# EAGLE board fabkit02 (EAGLE 5.11)
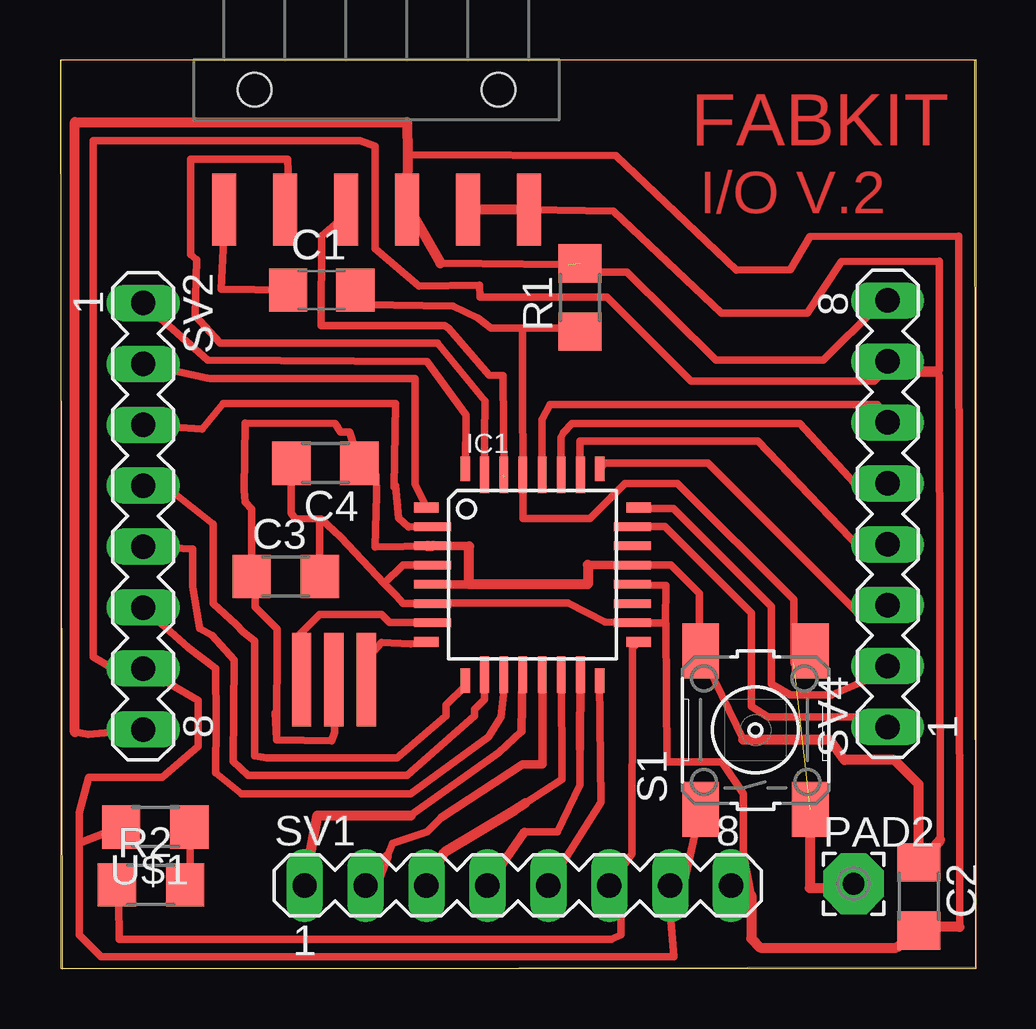
[diagram p0: board, top side]

Size 38.18 x 37.89 mm. Coordinates in mm from the lower left corner, seen from the top.
Outline: 0.1,0 38.18,0.08 38.13,37.89 0,37.89 0.1,0
Copper layers (1*16): Top 0.035mm / dielectric 1.5mm / Bottom 0.035mm
Design rules "default *": minimum track width 10mil, minimum drill 24mil, track to track 16mil, track to pad 16mil, pad to pad 16mil, via to via 16mil, smd to smd 16mil, copper to edge 16mil, drill to drill 8mil, minimum pad ring 10mil, minimum via ring 8mil, stop-mask expansion 4mil, vias tented up to drill 0mil, thermal gap 10mil
Milling: area 0,0 to 38.2,37.9

## Footprints (pad centres in the part's own frame; a part is rotated, then mirrored left to right if it is on the bottom)
C1206 = smd 1.6 x 1.8: 1 -1.4,0; 2 1.4,0
1206 = smd 1.6 x 1.803: 1 -1.422,0; 2 1.422,0
TQFP32-08 = smd 1.016 x 0.406: 1 -4.42,2.8; 8 -4.42,-2.8; 17 4.42,-2.8; 24 4.42,2.8 | smd 1.524 x 0.356: 2 -4.166,2; 3 -4.166,1.2; 4 -4.166,0.4; 5 -4.166,-0.4; 6 -4.166,-1.2; 7 -4.166,-2; 18 4.166,-2; 19 4.166,-1.2; 20 4.166,-0.4; 21 4.166,0.4; 22 4.166,1.2; 23 4.166,2 | smd 0.406 x 1.016: 9 -2.8,-4.42; 16 2.8,-4.42; 25 2.8,4.42; 32 -2.8,4.42 | smd 0.356 x 1.524: 10 -2,-4.166; 11 -1.2,-4.166; 12 -0.4,-4.166; 13 0.4,-4.166; 14 1.2,-4.166; 15 2,-4.166; 26 2,4.166; 27 1.2,4.166; 28 0.4,4.166; 29 -0.4,4.166; 30 -1.2,4.166; 31 -2,4.166
1X06-SMD = smd 1 x 3: 1 -6.35,5; 2 -3.81,5; 3 -1.27,5; 4 1.27,5; 5 3.81,5; 6 6.35,5 | hole 1.4: -5.08,0; 5.08,0
2,54/0,9 = drill 0.914 pad 2.54 octagon: 1 0,0
6MM_SWITCH = smd 2.286 x 1.524: 1 -3.302,2.286; 2 3.302,2.286; 3 -3.302,-2.286; 4 3.302,-2.286
MA08-1 = drill 1.016 long: 1 -8.89,0; 2 -6.35,0; 3 -3.81,0; 4 -1.27,0; 5 1.27,0; 6 3.81,0; 7 6.35,0; 8 8.89,0
EFOBM = smd 0.8 x 3.9: 1 -1.35,0; 2 0,0; 3 1.35,0

## Placement (x,y rotation side)
C1  .1uf  [C1206]  10.91,28.29 0 top
C2  1uf  [1206]  35.8,3.02 270 top
C3  .1uf  [1206]  9.41,16.35 0 top
C4  10uf  [1206]  11.06,21.08 180 top
IC1  ATMEGA48/88/168-AU  [TQFP32-08]  19.7,16.43 0 top
JP1  [1X06-SMD]  13.2,36.65 180 top
PAD2  WIREPAD2,54/0,9  [2,54/0,9]  33.08,3.55 0 top
R1  10k  [1206]  21.68,27.99 90 top
R2  499  [1206]  3.8,3.5 0 top
S1  [6MM_SWITCH]  28.99,9.95 90 top
SV1  [MA08-1]  19.09,3.47 0 top
SV2  [MA08-1]  3.47,18.87 270 top
SV4  [MA08-1]  34.51,18.97 90 top
U$1  [1206]  3.98,5.91 180 top
U$2  RESONATOREFOB  [EFOBM]  11.42,12.06 180 top

## Library data of the parts
C1 = rcl
C2-C4 R1 R2 S1 U$1 = ng
IC1 = atmega8
JP1 = SparkFun
PAD2 = wirepad
SV1 SV2 SV4 = con-lstb
U$2 = fab

## Nets
DTR: C1.1 JP1.6
GND: C2.1 C3.1 C4.1 IC1.3 IC1.5 IC1.21 JP1.1 JP1.2 S1.1 S1.2 SV1.7 SV2.7 SV4.7 U$1.2 U$2.2
MISO: IC1.16 SV1.5
MOSI: IC1.15 SV1.4
N$1: IC1.8 U$2.1
N$2: IC1.12 SV1.1
N$3: IC1.23 SV4.1
N$4: IC1.24 SV4.2
N$5: IC1.25 SV4.3
N$6: IC1.26 SV4.4
N$7: IC1.27 SV4.5
N$8: IC1.28 SV4.6
N$9: IC1.7 U$2.3
N$10: IC1.32 SV2.1
N$11: IC1.1 SV2.2
N$12: IC1.2 SV2.3
N$13: IC1.9 SV2.4
N$14: IC1.10 SV2.5
N$15: IC1.11 SV2.6
N$17: IC1.13 SV1.2
N$18: IC1.14 SV1.3
N$23: R2.2 U$1.1
RST: C1.2 IC1.29 PAD2.1 R1.1 S1.3 S1.4
RX: IC1.30 JP1.4
SCK: IC1.17 R2.1 SV1.6
TX: IC1.31 JP1.5
VCC: C2.2 C3.2 C4.2 IC1.4 IC1.6 IC1.18 IC1.20 JP1.3 R1.2 SV1.8 SV2.8 SV4.8

## Tracks (layer width: path | path; a pad name or v marks a point on that pad's centre or on a via)
DTR
  Top 0.305: JP1.6 6.77,31.55 6.82,30.42 6.72,28.34 C1.1
GND
  Top 0.305: IC1.3 13.14,17.58 13.2,19.78 13.17,20.59 C4.1 12.08,22.37 11.7,22.37 11.47,22.73 7.71,22.75 7.68,19.96 7.71,19.45 7.99,19.17 C3.1 8.45,15.9 8.14,15.59 8.14,15.08 9.06,14.17 9.03,9.55 | U$2.2 11.44,12.03 11.44,9.85 11.32,9.49 9.03,9.55 | 9.03,9.55 8.98,10.66 | 0.8,5.35 0.8,1.42 1.71,0.5 25.59,0.5 25.44,2.23 SV1.7 25.87,2.89 S1.1 | 0.8,5.35 0.8,6.5 1.21,7.97 4.25,7.97 5.75,9.27 5.75,11.2 SV2.7 3.7,12.14 2.4,12.39 1.38,13 1.38,34.51 12.51,34.51 13.14,34.29 13.14,30.02 14.97,28.47 17.49,28.49 17.51,28.01 22.8,28.01 26.3,24.51 33.95,24.51 34.28,24.84 | U$1.2 0.88,5.28 0.8,5.35 | 34.73,24.96 36.67,24.96 36.67,29.51 32.58,29.48 31.15,27.33 27.57,27.33 23.08,31.59 JP1.1 | 34.28,24.84 34.4,24.96 34.73,24.96 | 34.28,24.84 36.61,24.84 36.67,24.68 36.69,5.38 | 34.73,24.96 SV4.7 | IC1.21 25.47,16.83 26.66,15.64 26.66,12.67 S1.2 28.49,9.55
  Top 0.356: 17.06,17.62 15.33,17.62 | IC1.21 23.76,16.83 23.76,16.84 22.01,16.84 | 17.06,16.05 17.03,16.05 17.01,16.03 IC1.5
  Top 0.406: 22.01,16.84 22.01,16.03 17.11,16.03 17.11,16.02 17.08,16.05 17.06,16.05 | 15.33,17.63 15.3,17.63 | 17.06,16.05 17.06,17.62 | 17.06,16.05 17.06,16.03 | 15.33,17.62 15.33,17.63 | 15.33,17.63 15.35,17.63 | 15.35,17.63 IC1.3 | 15.35,17.63 15.35,17.62 | JP1.1 JP1.2 | 28.49,9.55 32.09,9.55 32.7,8.71 34.79,8.71 35.8,7.69 C2.1 35.7,4.21 36.69,5.38
MISO
  Top 0.305: SV1.5 22.54,6.93 IC1.16
MOSI
  Top 0.305: 19.37,5.71 20.74,5.71 21.68,7.67 21.67,9.16
  Top 0.356: SV1.4 19.37,5.71 | 21.67,9.16 IC1.15
N$1
  Top 0.305: IC1.8 14.62,13.55 13.4,13.61 12.72,12.83 U$2.1
N$2
  Top 0.305: 19.24,9.9 18.3,9.01 14.62,6.4 | IC1.12 19.3,12.14 19.29,12.14
  Top 0.356: 19.24,9.9 19.29,12.14
  Top 0.406: 10.53,2.89 SV1.1 10.73,6.4 14.62,6.4
N$3
  Top 0.305: IC1.23 25.22,18.43 28.82,14.83 28.82,10.94 29.5,10.51 34.35,10.51 SV4.1
N$4
  Top 0.305: SV4.2 34.33,12.34 32.17,11.43 30.44,11.43 29.65,11.88 29.65,15.11 25.57,19.2 24.15,19.2 IC1.24
  Top 0.406: IC1.24 24.07,19.23 24.07,19.22
N$5
  Top 0.305: SV4.3 33.21,14.88 27.01,21.08 22.73,21.08 IC1.25
N$6
  Top 0.305: 21.68,20.59 IC1.26 21.68,20.61 21.68,21.99 29.1,21.99 33.39,17.5 34.73,17.5 SV4.4
N$7
  Top 0.305: 20.9,21.2 20.92,21.2 | IC1.27 20.9,21.2 | 20.9,21.2 20.89,21.21 20.89,22.14 20.99,22.35 21.35,22.73 30.85,22.73 33.34,20.01 34.76,20.01 SV4.5
N$8
  Top 0.305: IC1.28 20.1,22.9 20.43,23.52 34.07,23.52 SV4.6
N$9
  Top 0.305: U$2.3 10.1,11.63 9.87,13.81 10.83,14.78 13.4,14.78 13.75,14.43 IC1.7
N$10
  Top 0.305: IC1.32 16.93,23.08 15.3,25.32 6.16,25.37 SV2.1
N$11
  Top 0.305: SV2.2 6.13,24.63 6.26,24.61 14.8,24.61 14.8,20.21 IC1.1
N$12
  Top 0.305: SV2.3 5.93,22.5 6.79,23.57 13.98,23.57 13.93,20.09 13.98,20.14 14.11,18.79 14.54,18.41 IC1.2
N$13
  Top 0.305: IC1.9 16.9,11.8 16.09,10.99 16.09,10.54 14.06,8.78 8.62,8.78 8.12,8.89 8.12,13.66 7.63,14.04 7.35,14.35 6.39,15.24 6.39,18.54 4.59,19.96 3.44,19.91 SV2.4
N$14
  Top 0.305: IC1.10 17.7,11.23 17.29,10.82 17.29,10.54 14.47,8.07 7.84,8.07 7.23,8.66 7.25,12.87 6.34,13.89 5.83,14.19 5.52,15.95 5.52,17.5 SV2.5
N$15
  Top 0.305: IC1.11 18.5,11.44 18.38,10.51 17.87,9.67 14.62,7.28 7.58,7.28 6.49,8.17 6.52,10.31 6.49,12.52 5.37,13.38 SV2.6
N$17
  Top 0.305: IC1.13 20.1,12.17 20.1,12.16 | 15.91,6.32 15.3,5.71 13.86,5.23 13.63,4.67
  Top 0.356: 20.1,12.16 20.1,8.53 19.29,8.53 15.91,6.32
  Top 0.406: SV1.2 13.32,3.86 13.63,4.67
N$18
  Top 0.305: IC1.14 20.92,7.89 19.39,6.9
  Top 0.406: SV1.3 16.04,4.87 18.94,6.6 19.39,6.9
N$23
  Top 0.305: U$1.1 5.47,2.87 R2.2
RST  (1 unrouted)
  Top 0.305: C1.2 12.71,28.34 12.66,27.68 16.4,27.63 17.44,27.12 17.97,26.72 19.24,26.72 | 19.24,26.72 21.53,26.72 R1.1 | 19.24,26.72 19.29,26.67 19.29,26.06 19.27,24.07 IC1.29 19.3,18.77 22.09,18.77 23.56,20.24 25.74,20.24 30.59,15.39 30.59,12.75 S1.4
  Top 0.406: S1.3 31.26,6.65 31.26,3.37 33.08,3.37 PAD2.1
RX  (1 unrouted)
  Top 0.305: 18.5,20.49 18.48,24.73 17.89,24.76 16.19,26.71 16.03,26.82 10.89,26.82 10.9,30.55 11.95,31.45 11.95,31.77
  Top 0.406: JP1.4 12.08,32.05 11.93,31.44 12.05,31.92 11.95,31.77
SCK
  Top 0.305: R2.1 2.45,2.79 2.48,1.24 23,1.24 23.38,1.42 23.38,2.66 SV1.6 23.84,4.8 23.86,12.34 23.86,13.37 IC1.17
TX
  Top 0.305: 9.56,31.75 9.49,33.75 5.45,33.75 5.45,29.76 5.7,29.56 5.63,27.22 6.67,26.08 15.74,26.08 17.72,23.67 17.7,22.14 IC1.31
  Top 0.406: 9.56,31.75 JP1.5
VCC  (1 unrouted)
  Top 0.305: IC1.20 25.26,15.97 25.24,14.45 25.11,14.42 | 25.11,14.42 IC1.18 22.72,14.45 21.17,15.26 15.53,15.26 IC1.6 14.29,15.23 14.01,15.57 13.5,16.07 | SV2.8 1.18,9.77 0.62,9.88 | 37.5,1.75 37.48,30.55 31.26,30.53 30.44,29.15 28.21,29.13 23.18,33.9 14.49,33.93 | 14.47,35.3 14.49,34.39 | IC1.4 14.31,16.83 13.5,16.07 | C4.2 9.64,18.99 9.79,18.77 10.89,18.75 | 10.89,18.75 11.7,18 13.5,16.07 | C3.2 10.83,18.7 10.89,18.75 | 28.64,3.22 SV1.8 28.82,3.07 28.49,4.77 28.49,7.28 27.6,8.63 25.31,8.63 25.26,14.37 25.11,14.42 | 15.86,29.41 21.04,29.36 21.07,29.33 | SV4.8 34.05,27.58 31.81,25.37 27.34,25.37 23.64,29.05 22.03,29.05 R1.2
  Top 0.406: 0.62,9.88 0.62,35.3 14.47,35.3 14.49,33.93 14.44,30.96 JP1.3 14.57,31.67 15.86,29.41 | 21.07,29.33 21.2,29.36 | 28.82,3.07 28.82,1.27 29.2,0.88 34.86,0.88 C2.2 35.88,1.75 37.5,1.75

## Text on the board
Top: FABKIT | I/O V.2